# Altium PCB PCB1.PcbDoc
Units mm, origin at the board's own origin, x right, y up, seen from the top; angles counter-clockwise.
Board outline 152.4 x 101.6 mm, 2 copper layers (Top Layer, Bottom Layer); 13 components, 6 nets, 26 pads, 0 vias.
Unrouted connection lines stored in the file: 19.
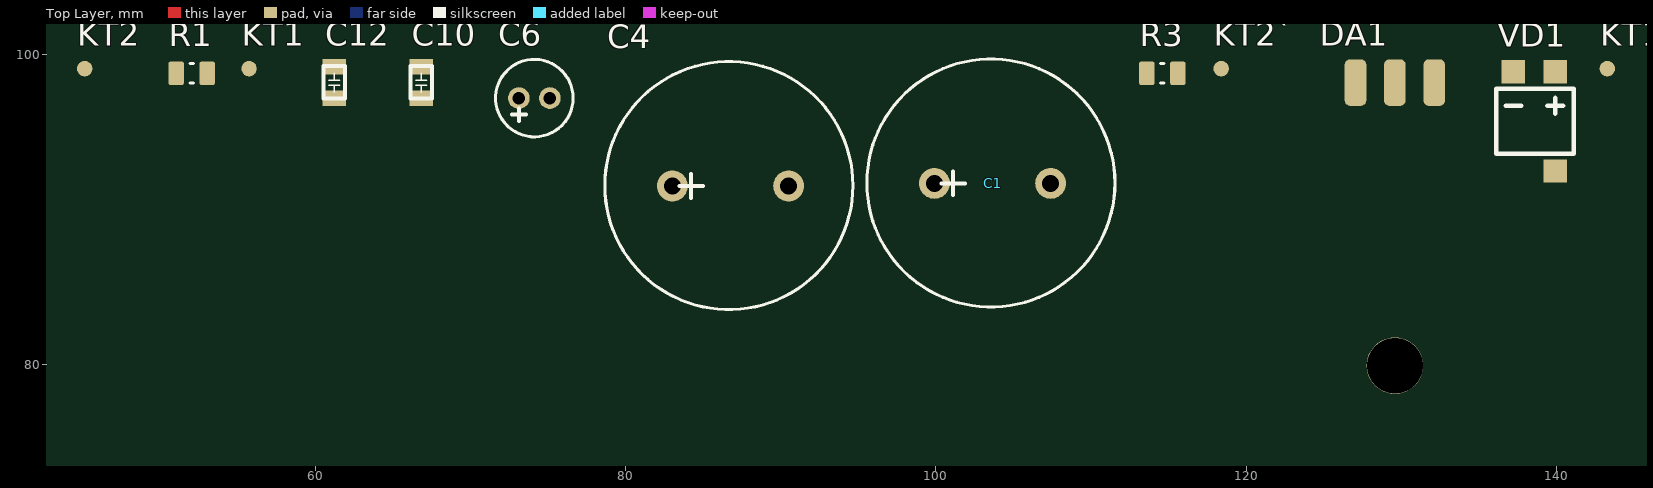
[diagram p0: Top Layer view]
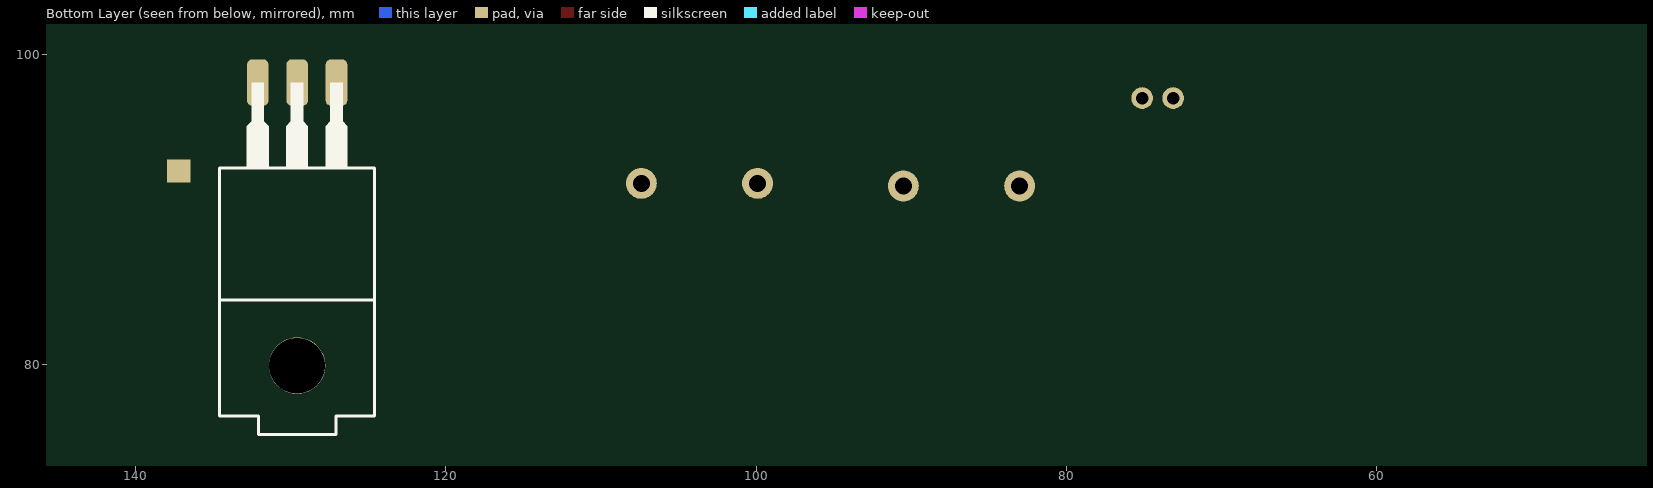
[diagram p1: Bottom Layer view, seen from below]

## Layer stack, top to bottom
Top Solder: solder mask 0.0102, Solder Resist, Dk 3.5
Top Layer: signal copper 0.0356
Dielectric 1: dielectric 0.32, FR-4, Dk 4.8
Bottom Layer: signal copper 0.0356
Bottom Solder: solder mask 0.0102, Solder Resist, Dk 3.5

## Board outline
25.4,25.4 177.8,25.4 177.8,127 25.4,127

## Design rules (kind name [scope] priority, off if disabled: settings)
Clearance [All] p1: gap=0.254 ignorepadtopadclearanceinfootprint=FALSE except(0: Arc-Hole Track-Hole SMDPad-Hole THPad-Hole Via-Hole Fill-Hole Poly-Hole Region-Hole Text-Hole)
PolygonConnect [All] p1: connectstyle=Relief reliefconductorwidth=0.254 reliefentries=4 polygonreliefangle="90 Angle" airgapwidth=0.254
RoomDefinition Skhema_s_platoy [InComponentClass('Skhema_s_platoy')] p1: confinementstyle=ConfineIn formatcopy=TRUE lockcomponents=FALSE outline 44.2,75.2 148.1,75.2 148.1,102.5 44.2,102.5
RoutingVias [All] p1: holewidth=0.711 width=1.27 viastyle="Through Hole" minholewidth=0.711 minwidth=1.27 maxholewidth=0.711 maxwidth=1.27
SolderMaskExpansion [All] p1: expansion=0.102
Width [All] p1: maxlimit=0.254 minlimit=0.254 preferedwidth=0.254
30 further rules are at their usual default settings.

## Components (designator, comment, footprint, x,y, rotation, side; value= is the part's Value field where it differs from the comment)
C1 "2200m" 1632 99.9,91.7 r0 top
C4 "2200m" 1632 83,91.532 r0 top
C6 "470m" K50-35-16V_0511 73.1,97.2 r0 top
C10 "0.1m" C0805 66.8,97.2 r90 top
C12 "C0805" C0805 61.2,97.2 r90 top
DA1 "LM1084-AD" TO-220FP_PL 129.6,98.2 r0 top
KT1 "***" KT_R100X100 55.7,99.1 r90 top
KT1` "***" KT_R100X100 143.3,99.1 r90 top
KT2 "***" KT_R100X100 45.1,99.1 r90 top
KT2` "***" KT_R100X100 118.4,99.1 r90 top
R1 "2,0 кОм" RESC2012X50 51,98.8 r0 top
R3 "240 Ом" RESC2012X50 113.6,98.8 r0 top
VD1 "B05S" B05S 150.1,79.6 r90 top

## Footprints (in the part's own frame and the unit in brackets; to place one, negate y for a bottom-side part, rotate by r counter-clockwise, add the part's x,y. Pads: shape width x height; smd on the part's side, far side on the other; paste and mask are expansions set on the pad)
1632 [mm] "K50-35-25V_1632"
  round 2 hole 1.1: 1(0,0) 2(7.5,0)
  silkscreen extent -4.35,-7.97 11.65,8.02
B05S [mm]
  rect 1.5x1.5 smd: 1(19.304,10.16) 2(19.304,12.86) 4(12.904,10.16)
  rect 1.5x1.5 smd far side: 3(12.904,12.86)
  silkscreen extent 14,8.96 18.2,13.96
C0805 [mm]
  rect 1x1.5 smd: 1(0,0) 2(2.032,0)
  silkscreen extent -0.03,-0.7 2.07,0.7
K50-35-16V_0511 [mm]
  round 1.4 hole 0.8: 1(0,0) 2(2,0)
  silkscreen extent -1.5,-2.5 3.5,2.5
KT_R100X100 [mm] "KT, Round, 1mm x 1mm"
  round 1 smd: 1(0,0)
RESC2012X50 [mm] "Chip Resistor, EIA 0805, Metric 2012, Body 2.0x1.2mm, IPC Medium Density"
  rrect25% 1x1.5 smd: 1(0,0) 2(2,0)
  silkscreen extent 0.9,-0.63 1.1,0.63, body extent 0,-0.62 2,0.62, height 0.5
TO-220FP_PL [mm]
  rrect50% 1.4x3 all layers, no hole: 1(-2.54,0) 2(0,0) 3(2.54,0)
  round 3.65 hole 3.6: 4(0,-18.26)

## Part data
C1 C4: library part K50-35_1632, "K50-35_1632", PrefVal=K50-35, Title=Конденсатор
C6: library part K50-35-16V_0511, "K50-35-16V_0511", PrefVal=K50-35, Title=Конденсатор
C10: library part C0805, "C0805", PrefVal=0805, Title=Конденсатор
DA1: library part LM317, "LM317", Case=TO-220FP, Producer="National Semi", Title=Микросхема
KT1 KT1` KT2 KT2`: library part КТ, "Контрольная точка", BOM Type=Разъёмы, ESS key=00000002852, Part Number=КТ, Serie=***, Title="Разъёмы прочие"
R1: library part "0805 2,0 кОм ±5%", "EIA 0805, Metric 2012, 0,125 Вт, чип резистор", Case="0805 (2,0x1,2)", Temperature=-55...+125, Analog Pin-to-Pin="Р1-12-0,125-2,0 кОм ±5%-Т", BOM Type=Резисторы, ComponentLink1Description="Интернет PDF", ComponentLink1URL=https://www.smd.ru/katalog/rezistory_i_potenciometry/postoyannye/chip/, ComponentLink2Description="Локальный PDF", ComponentLink2URL=\\niistt.local\kb1\Проекты\Altium\dblib-v2\Storage\PDF\0805.pdf, ESS key=00000000948, Part Number="0805 2,0 кОм ±5%", Serie="0805 ±5%", Title=Резисторы, YPP key=00000009811
R3: library part "0805 240 Ом ±5%", "EIA 0805, Metric 2012, 0,125 Вт, чип резистор", Case="0805 (2,0x1,2)", Temperature=-55...+125, Analog Pin-to-Pin="Р1-12-0,125-240 Ом ±5%-Т", BOM Type=Резисторы, ComponentLink1Description="Интернет PDF", ComponentLink1URL=https://www.smd.ru/katalog/rezistory_i_potenciometry/postoyannye/chip/, ComponentLink2Description="Локальный PDF", ComponentLink2URL=\\niistt.local\kb1\Проекты\Altium\dblib-v2\Storage\PDF\0805.pdf, ESS key=00000000990, Part Number="0805 240 Ом ±5%", Serie="0805 ±5%", Title=Резисторы, YPP key=R0000004811
VD1: Case=DB-1MS, PrefVal="Диодный мост", Title=Диод
C12: PrefVal=0805, Title=Конденсатор

## Nets (pads, with @x,y where several pads share a name; then routed paths per layer and width w, separated by ;. In a path a pad name is that pad's centre, name@x,y a point inside that pad or via, vN(x,y) a via of type N, cw(c..) or ccw(c..) an arc to the next point about the centre after c; other vN are vias at no path point)
NetC1_1: C1.1 C4.1 C10.2 DA1.3 VD1.3
NetC1_2: C1.2 C4.2 C6.2 C10.1 C12.1 KT2.1 R1.1 VD1.4
NetC6_1: C6.1 C12.2 DA1.2 KT2`.1 R3.2
NetDA1_1: DA1.1 R1.2 R3.1
NetKT1_1: KT1.1 VD1.2
NetKT1`_1: KT1`.1 VD1.1
pads on no net: DA1.4